# Altium PCB PCB1.PcbDoc
Units mm, origin at the board's own origin, x right, y up, seen from the top; angles counter-clockwise.
Board outline 76 x 105 mm, 2 copper layers (Top Layer, Bottom Layer); 39 components, 59 nets, 148 pads, 16 vias.
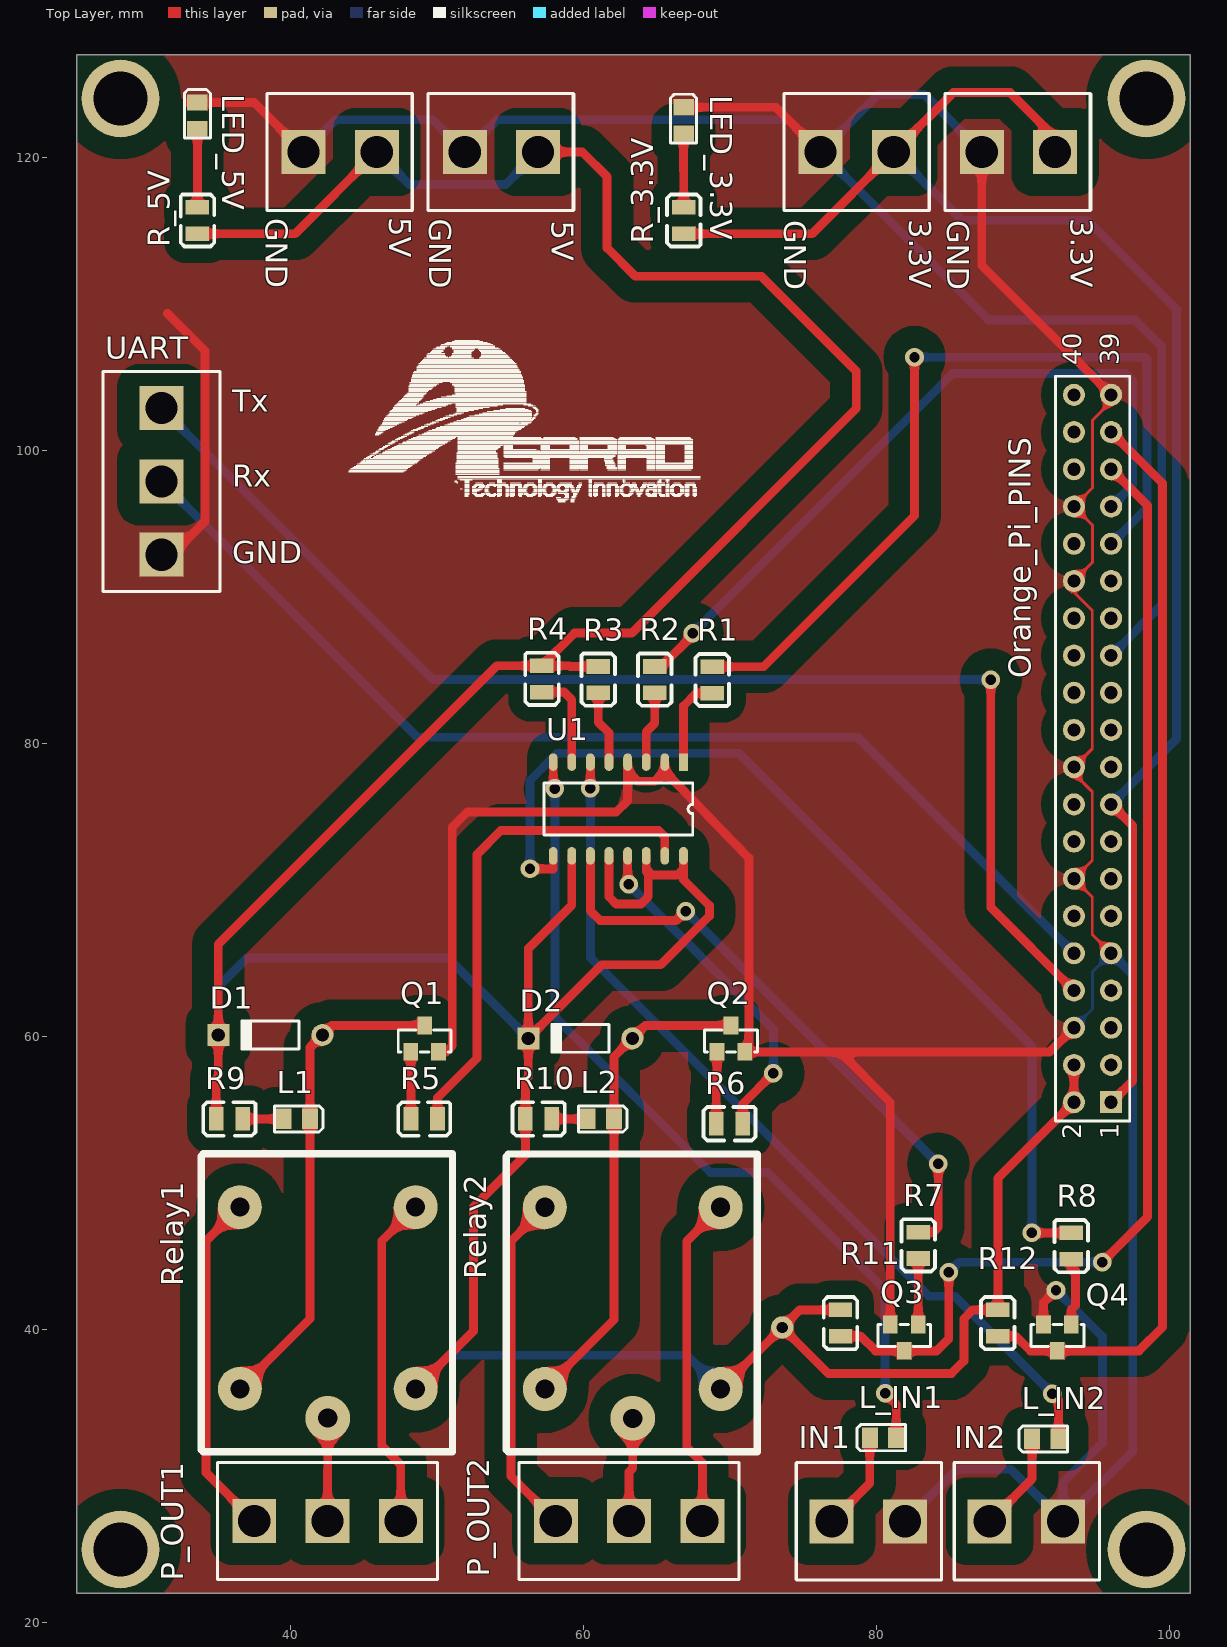
[diagram p0: Top Layer view]
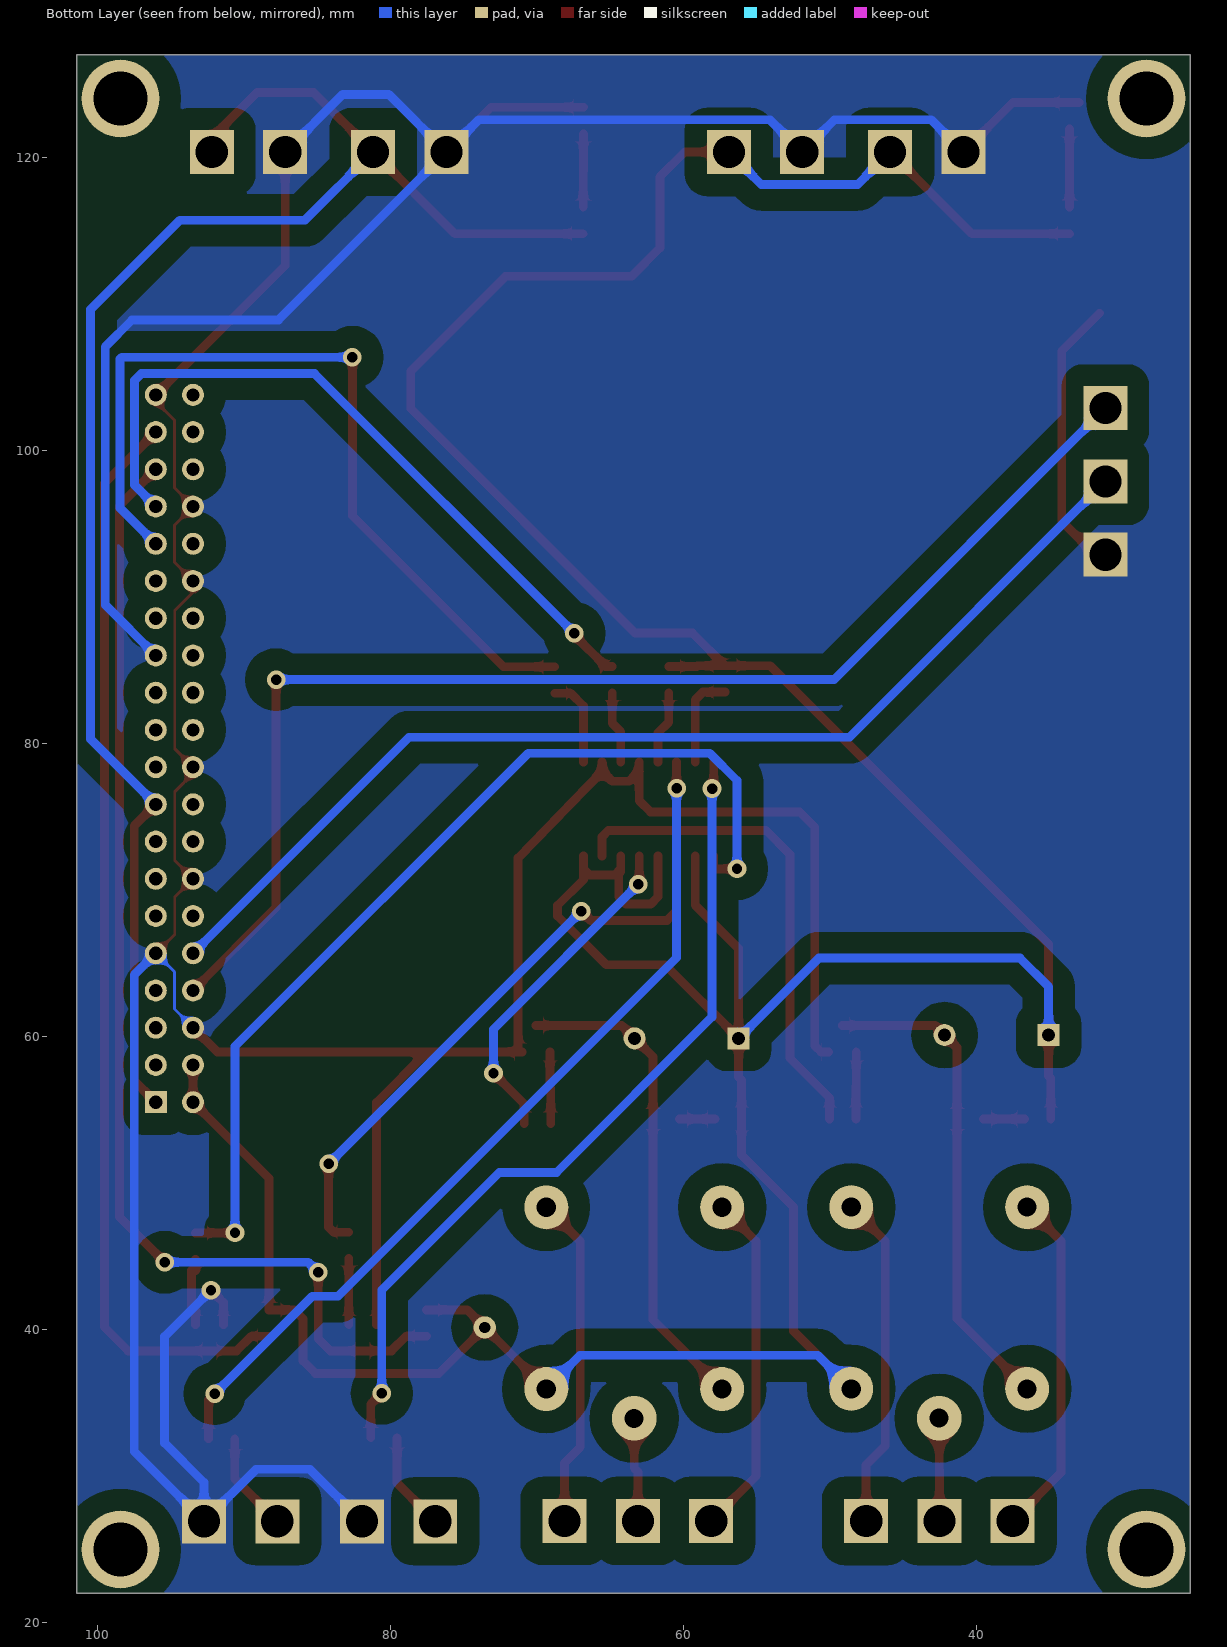
[diagram p1: Bottom Layer view, seen from below]

## Layer stack, top to bottom
Top Solder: solder mask 0.0102, Solder Resist, Dk 3.5
Top Layer: signal copper 0.0356
Dielectric 1: dielectric 0.32, FR-4, Dk 4.8
Bottom Layer: signal copper 0.0356
Bottom Solder: solder mask 0.0102, Solder Resist, Dk 3.5

## Board outline
25.4,127 101.4,127 101.4,22 25.4,22

## Design rules (kind name [scope] priority, off if disabled: settings)
Clearance Polygon [InPolygon] p1: gap=1.5 ignorepadtopadclearanceinfootprint=FALSE
Clearance [All] p2: gap=0.4 ignorepadtopadclearanceinfootprint=FALSE
HoleSize [All] p1: absolutevalues=TRUE maxlimit=4 minlimit=0.025 maxpercent=80.000 minpercent=20.000
PlaneClearance [All] p1: clearance=0.6
PlaneConnect [All] p1: planeconnectstyle=Direct reliefexpansion=0.508 reliefentries=4 reliefconductorwidth=0.254 reliefairgap=0.254
PolygonConnect [All] p1: connectstyle=Direct reliefconductorwidth=0.254 reliefentries=4 polygonreliefangle="90 Angle" airgapwidth=0.254
RoutingVias [All] p1: holewidth=3.7 width=4 viastyle="Through Hole" minholewidth=0.6 minwidth=1.27 maxholewidth=4 maxwidth=5
SilkToSilkClearance [All] p1: silktosilkclearance=0.2
SilkToSolderMaskClearance [IsPad] p1: minsilkscreentomaskgap=0 clearancetoexposedcopper=TRUE
SolderMaskExpansion [All] p1: expansion=0.102
Width [All] p1: maxlimit=0.6 minlimit=0.2 preferedwidth=0.6
25 further rules are at their usual default settings.

## Classes and differential pairs
component class Sheet1: 3.3V 5V D1 D2 IN1 IN2 L1 L2 L_IN1 L_IN2 LED_3.3V LED_5V Orange_Pi_PINS P_OUT1 P_OUT2 Q1 Q2 Q3 Q4 R1 R2 R3 R4 R5 R6 R7 R8 R9 R10 R11 R12 R_3.3V R_5V Relay1 Relay2 U1 UART

## Components (designator, comment, footprint, x,y, rotation, side; value= is the part's Value field where it differs from the comment)
3.3V "F2" PCBComponent_1#1 104.534,84.665 r90 top (schematic designator f4)
3.3V "F2" PCBComponent_1#1 115.534,84.665 r90 top (schematic designator f3)
5V "F2" PCBComponent_1#1 69.259,84.665 r90 top (schematic designator f6)
5V "F2" PCBComponent_1#1 80.259,84.665 r90 top (schematic designator f5)
D1 "Diode 1N914" DO-35 38.625,60.1 r180 top
D2 "Diode 1N914" DO-35 59.775,59.875 r180 top
IN1 "F2" PCBComponent_1#1 53.557,62.612 r270 top (schematic designator f1)
IN2 "F2" PCBComponent_1#1 64.332,62.612 r270 top (schematic designator f2)
L1 "LED_0805" LED_0805 40.436,54.375 r0 top
L2 "LED_0805" LED_0805 61.181,54.375 r0 top
L_IN1 "LED_0805" LED_0805 80.414,32.625 r180 top
L_IN2 "LED_0805" LED_0805 91.489,32.55 r180 top
LED_3.3V "LED_0805" LED_0805 66.816,122.51 r90 top
LED_5V "LED_0805" LED_0805 33.65,122.836 r90 top
Orange_Pi_PINS "Header 20X2" HDR2X20 95.99,55.52 r90 top
P_OUT1 "Terminal3" TERMINAL-3 42.526,26.943 r0 top
P_OUT2 "Terminal3" TERMINAL-3 63.1,26.95 r0 top
Q1 "BC817" "PCBComponent_1 - duplicate2" 49.15,58.95 r0 top
Q2 "BC817" "PCBComponent_1 - duplicate2" 70.05,58.95 r0 top
Q3 "BC817" "PCBComponent_1 - duplicate2" 81.875,40.35 r180 top
Q4 "BC817" "PCBComponent_1 - duplicate2" 92.325,40.35 r180 top
R1 "Res_0805" ResS 68.775,84.325 r90 top value=1K
R2 "Res_0805" ResS 64.85,84.35 r270 top value=1K
R3 "Res_0805" ResS 61,84.35 r270 top value=1K
R4 "Res_0805" ResS 57.15,84.4 r270 top value=1K
R5 "Res_0805" ResS 49.125,54.375 r180 top value=560
R6 "Res_0805" ResS 69.95,54.05 r180 top value=560
R7 "Res_0805" ResS 82.825,45.75 r270 top value=560
R8 "Res_0805" ResS 93.275,45.7 r270 top value=560
R9 "Res_0805" ResS 35.831,54.375 r180 top value=160
R10 "Res_0805" ResS 56.925,54.375 r180 top value=160
R11 "Res_0805" ResS 77.525,40.45 r90 top value=160
R12 "Res_0805" ResS 88.25,40.45 r90 top value=160
R_3.3V "Res_0805" ResS 66.825,115.675 r90 top value=1k
R_5V "Res_0805" ResS 33.65,115.675 r270 top value=1k
Relay1 "JOC-3FF" PCBComponent_1#2 42.542,33.96 r0 top
Relay2 "JOC-3FF" PCBComponent_1#2 63.35,33.95 r0 top
U1 "TLP-281-4" TLP281-4 66.81,78.725 r270 top
UART "Terminal3" TERMINAL-3 31.2,97.875 r90 top (schematic designator P)

## Footprints (in the part's own frame and the unit in brackets; to place one, negate y for a bottom-side part, rotate by r counter-clockwise, add the part's x,y. Pads: shape width x height; smd on the part's side, far side on the other; paste and mask are expansions set on the pad)
DO-35 [mm] "Diode, Axial; Body 3.8 x 1.9 mm (LxDia. max), Lead Dia. 0.53 mm (max)"
  round 1.5 hole 0.9: 1(-3.55,0)
  rect 1.5x1.5 hole 0.9: 2(3.55,0)
  silkscreen extent -1.95,-0.95 2.05,0.95
HDR2X20 [mm] "Connector; Header; 20x2 Position"
  rect 1.5x1.5 hole 0.9: 1(0,0)
  round 1.5 hole 0.9: 2(0,2.54) 3(2.54,0) 4(2.54,2.54) 5(5.08,0) 6(5.08,2.54) 7(7.62,0) 8(7.62,2.54) 9(10.16,0) 10(10.16,2.54) 11(12.7,0) 12(12.7,2.54) 13(15.24,0) 14(15.24,2.54) 15(17.78,0) 16(17.78,2.54) 17(20.32,0) 18(20.32,2.54) 19(22.86,0) 20(22.86,2.54) 21(25.4,0) 22(25.4,2.54) 23(27.94,0) 24(27.94,2.54) 25(30.48,0) 26(30.48,2.54) 27(33.02,0) 28(33.02,2.54) 29(35.56,0) 30(35.56,2.54) 31(38.1,0) 32(38.1,2.54) 33(40.64,0) 34(40.64,2.54) 35(43.18,0) 36(43.18,2.54) 37(45.72,0) 38(45.72,2.54) 39(48.26,0) 40(48.26,2.54)
  silkscreen extent -1.27,-1.27 49.53,3.81
LED_0805 [mm]
  rect 1.1x1.4 smd: 1(-0.911,0) 2(0.889,0)
  silkscreen extent -1.53,-0.89 1.78,0.89
PCBComponent_1#1 [mm]
  rect 3x3 hole 2.2: 1(35.687,23.368) 2(35.687,28.368)
  silkscreen extent 31.69,20.95 39.69,30.87
PCBComponent_1#2 [mm]
  round 3 hole 1.3: 1(-6,2) 2(6,2) 3(-6,14.4) 4(6,14.4)
  round 3.048 hole 1.3: 5(0,0)
  silkscreen extent -8.64,-2.29 8.51,18.03
"PCBComponent_1 - duplicate2" [mm]
  rect 1x1.2 smd: B(-0.95,0) C(0,1.8) E(0.95,0)
  silkscreen extent -1.8,0 1.8,1.5
ResS [mm]
  rect 1x1.6 smd: 1(-0.9,0) 2(0.9,0)
  silkscreen extent -1.78,-1.14 1.78,1.14
TERMINAL-3 [mm]
  rect 3x3 hole 2.2: 1(-5,0) 2(0,0) 3(5,0)
  silkscreen extent -7.5,-4 7.5,4
TLP281-4 [mm]
  rect 1.2x0.6 smd: 1(0,0)
  oval 1.2x0.6 smd: 2(0,-1.27) 3(0,-2.54) 4(0,-3.81) 5(0,-5.08) 6(0,-6.35) 7(0,-7.62) 8(0,-8.89) 9(6.4,-8.89) 10(6.4,-7.62) 11(6.4,-6.35) 12(6.4,-5.08) 13(6.4,-3.81) 14(6.4,-2.54) 15(6.4,-1.27) 16(6.4,0)
  silkscreen extent 1.43,-9.52 4.97,0.64

## Part data
3.3V 3.3V 5V 5V IN1 IN2: library part Component_1
D1 D2: "High Conductance Fast Diode", Code_JEDEC=DO-204-AH, ComponentLink1Description="Manufacturer Link", ComponentLink1URL=http://www.fairchildsemi.com/, ComponentLink2Description=Datasheet, ComponentLink2URL=http://www.fairchildsemi.com/ds/1N%2F1N4448.pdf, DatasheetVersion=1997, LatestRevisionDate=17-Jul-2002, LatestRevisionNote="Re-released for DXP Platform.", PackageDescription="Diode, Axial; Body 3.8 x 1.9 mm (LxDia. max), Lead Dia. 0.53 mm (max)", PackageReference=DO-35, Published=8-Jun-2000, Publisher="Altium Limited"
Orange_Pi_PINS: "Header, 20-Pin, Dual row", LatestRevisionDate=17-Jul-2002, LatestRevisionNote="Re-released for DXP Platform.", Publisher="Altium Limited"
P_OUT1 P_OUT2 UART: library part Terminal-3
Q1 Q2 Q3 Q4: library part Transistor_SMD_NPN
Relay1 Relay2: library part Relay-5VDC, "Relay"
U1: library part OPTO-TLP281-4

## Free pads (board coordinates)
  round 5.3 hole 3.7: 2(28.4,124) 3(98.4,124) 4(98.4,25) 5(28.4,25)
  round 1.524 hole 0.762: 6(73.55,40.15)

## Via types
v1: diameter 1.27, hole 0.711, Top Layer to Bottom Layer, 16 vias

## Nets (pads, with @x,y where several pads share a name; then routed paths per layer and width w, separated by ;. In a path a pad name is that pad's centre, name@x,y a point inside that pad or via, vN(x,y) a via of type N, cw(c..) or ccw(c..) an arc to the next point about the centre after c; other vN are vias at no path point)
GND: 3.3V.2 5V.2 IN1.2 IN2.2 LED_3.3V.2 LED_5V.2 Orange_Pi_PINS.6 Orange_Pi_PINS.9 Orange_Pi_PINS.14 Orange_Pi_PINS.20 Orange_Pi_PINS.25 Orange_Pi_PINS.30 Orange_Pi_PINS.34 Orange_Pi_PINS.39 Q1.E Q2.E Q3.E Q4.E U1.2 U1.4 UART.1 | length 388.9
  Top Layer w0.2: Orange_Pi_PINS.9 94.7,66.97 94.7,69.51 Orange_Pi_PINS.14 94.7,72.01 94.7,76.7 93.45,77.95 Orange_Pi_PINS.20 94.7,79.63 94.7,89.058 93.45,90.308 Orange_Pi_PINS.30 94.725,92.355 94.725,94.885 Orange_Pi_PINS.34 94.725,97.435 94.725,102.05 95.99,103.315 Orange_Pi_PINS.39
  Top Layer w0.6: UART.1 31.9,92.875 34.175,95.15 34.175,106.77 31.6,109.345 ; LED_5V.2@33,123.725 LED_5V.2 37.518,123.725 5V.2@40.891,120.352 ; Q1.E 50.606,58.95 51.029,59.372 51.029,74.295 52.054,75.32 62.23,75.32 63,76.09 63,78.105 ; U1.4 63,78.105 ; U1.2 65.54,78.105 ; LED_3.3V.2 73.119,123.399 3.3V.2@76.166,120.352 ; Q2.E Q2.E@71.272,58.95 ; Q3.E 80.925,55.495 77.47,58.95 ; 3.3V.2@87.166,120.352 87.166,112.604 Orange_Pi_PINS.39 ; Q4.E 91.375,41.845 v1(92.227,42.697) ; Orange_Pi_PINS.6 91.8,58.95 77.47,58.95 ; 63,78.105 63.686,77.419 64.854,77.419 65.54,78.105 ; 65.54,78.105 71.272,72.187 Q2.E@71.272,58.95 ; Q2.E@71.272,58.95 77.47,58.95
  Bottom Layer w0.2: Orange_Pi_PINS.6 94.725,61.875 94.725,64.415 Orange_Pi_PINS.9
  Bottom Layer w0.6: 5V.2@40.891,120.352 43.094,122.555 49.688,122.555 51.891,120.352 54.094,122.555 73.963,122.555 3.3V.2@76.166,120.352 ; IN1.2 85.48,30.48 89.145,30.48 IN2.2 ; 3.3V.2@87.166,120.352 83.236,124.282 80.096,124.282 3.3V.2@76.166,120.352 ; v1(92.227,42.697) 95.4,39.525 95.4,32.275 92.7,29.575 IN2.2 ; Orange_Pi_PINS.9 97.46,64.21 97.46,31.685 IN2.2 ; Orange_Pi_PINS.25 99.44,89.45 99.44,107.062 97.612,108.89 87.628,108.89 3.3V.2@76.166,120.352
INP1: IN1.1 L_IN1.2 | length 6.8
  Top Layer w0.6: IN1.1 79.525,29.525 L_IN1.2
INP2: IN2.1 L_IN2.2 | length 6.8
  Top Layer w0.6: IN2.1 90.6,29.825 L_IN2.2
NetL1_1: L1.1 R9.1 | length 2.8
  Top Layer w0.6: R9.1 L1.1
NetL2_1: L2.1 R10.1 | length 2.4
  Top Layer w0.6: R10.1 L2.1
NetL_IN1_1: L_IN1.1 U1.8 | length 58.1
  Top Layer w0.6: U1.8 57.92,77.038 v1(58.039,76.919) ; v1(80.569,35.662) 81.325,34.905 L_IN1.1
  Bottom Layer w0.6: v1(58.039,76.919) 58.039,61.341 68.656,50.724 72.551,50.724 80.569,42.706 v1(80.569,35.662)
NetL_IN2_1: L_IN2.1 U1.6 | length 60.4
  Top Layer w0.6: v1(60.46,76.937) U1.6 ; v1(91.973,35.636) 92.4,35.21 L_IN2.1
  Bottom Layer w0.6: v1(60.46,76.937) 60.46,65.39 83.564,42.286 85.324,42.286 v1(91.973,35.636)
NetLED_3.3V_1: LED_3.3V.1 R_3.3V.2 | length 5
  Top Layer w0.6: LED_3.3V.1 66.816,119.084 66.825,119.075 R_3.3V.2
NetLED_5V_1: LED_5V.1 R_5V.1 | length 5.4
  Top Layer w0.6: R_5V.1 LED_5V.1
NetP_OUT1_1: P_OUT1.1 Relay1.3 | length 23.7
  Top Layer w0.6: Relay1.3 34.239,46.057 34.239,30.23 P_OUT1.1
NetP_OUT1_2: P_OUT1.2 Relay1.5 | length 7
  Top Layer w0.6: P_OUT1.2 42.526,30.429 42.542,30.445 Relay1.5
NetP_OUT1_3: P_OUT1.3 Relay1.4 | length 22.9
  Top Layer w0.6: P_OUT1.3 47.526,30.785 46.228,32.083 46.228,46.046 Relay1.4
NetP_OUT2_1: P_OUT2.1 Relay2.3 | length 23.6
  Top Layer w0.6: Relay2.3 55.042,46.042 55.042,30.008 P_OUT2.1
NetP_OUT2_2: P_OUT2.2 Relay2.5 | length 7.1
  Top Layer w0.6: P_OUT2.2 63.1,30.302 63.35,30.552 Relay2.5
NetP_OUT2_3: P_OUT2.3 Relay2.4 | length 22.8
  Top Layer w0.6: P_OUT2.3 68.1,30.912 67.031,31.981 67.031,46.031 Relay2.4
NetQ1_B: Q1.B R5.2 | length 4.6
  Top Layer w0.6: Q1.B 48.2,56.667 48.225,56.642 R5.2
NetQ2_B: Q2.B R6.2 | length 4.9
  Top Layer w0.6: R6.2 69.05,56.464 69.1,56.514 Q2.B
NetQ3_B: Q3.B R7.2 | length 4.5
  Top Layer w0.6: Q3.B R7.2
NetQ4_B: Q4.B R8.2 | length 4.9
  Top Layer w0.6: Q4.B 93.275,41.362 93.562,41.65 93.562,44.026 93.275,44.026 R8.2
NetR1_1: R1.1 U1.1 | length 6.2
  Top Layer w0.6: U1.1 66.81,82.55 67.685,83.425 R1.1
NetR2_2: R2.2 U1.3 | length 5
  Top Layer w0.6: U1.3 64.27,80.797 64.85,81.377 R2.2
NetR3_2: R3.2 U1.5 | length 5
  Top Layer w0.6: R3.2 61,81.451 61.73,80.721 U1.5
NetR4_2: R4.2 U1.7 | length 6.5
  Top Layer w0.6: R4.2 58.674,83.5 59.19,82.984 U1.7
NetR5_1: R5.1 U1.15 | length 34.2
  Top Layer w0.6: R5.1 50.025,55.829 52.73,58.535 52.73,72.441 54.347,74.058 65.117,74.058 65.54,73.635 U1.15
NetR6_1: R6.1 U1.13 | length 23.3
  Top Layer w0.6: U1.13 63,70.452 v1(63.068,70.383) ; R6.1 70.85,55.397 v1(72.949,57.496)
  Bottom Layer w0.6: v1(63.068,70.383) 72.949,60.503 v1(72.949,57.496)
NetR7_1: R7.1 U1.11 | length 41
  Top Layer w0.6: U1.11 60.46,68.58 61.12,67.92 66.319,67.92 v1(66.954,68.555) ; R7.1 83.861,46.65 84.201,46.99 v1(84.201,51.308)
  Bottom Layer w0.6: v1(66.954,68.555) v1(84.201,51.308)
NetR8_1: R8.1 U1.9 | length 67.2
  Top Layer w0.6: v1(56.337,71.438) 57.92,71.438 U1.9 ; v1(90.585,46.6) R8.1
  Bottom Layer w0.6: v1(56.337,71.438) 56.337,77.47 58.191,79.324 70.587,79.324 90.585,59.325 v1(90.585,46.6)
PA0: Orange_Pi_PINS.13
PA1: Orange_Pi_PINS.11
PA2: Orange_Pi_PINS.22
PA3: Orange_Pi_PINS.15
PA6: Orange_Pi_PINS.7
PA7: Orange_Pi_PINS.29
PA8: Orange_Pi_PINS.31 R1.2 | length 58.4
  Top Layer w0.6: R1.2 72.271,85.225 82.575,95.529 v1(82.575,106.35)
  Bottom Layer w0.6: v1(82.575,106.35) 98.32,106.35 98.44,106.23 98.44,96.07 Orange_Pi_PINS.31
PA9: Orange_Pi_PINS.33 R2.1 | length 50.3
  Top Layer w0.6: R2.1 65.303,85.25 67.437,87.384 v1(67.437,87.503)
  Bottom Layer w0.6: v1(67.437,87.503) 85.164,105.23 96.985,105.23 97.44,104.775 97.44,97.61 Orange_Pi_PINS.33
PA10: Orange_Pi_PINS.35 Q3.C R11.1 | length 79.8
  Top Layer w0.6: R11.1 78.918,39.55 79.918,38.55 Q3.C 84.092,38.55 84.912,39.37 v1(84.912,43.917) ; v1(95.377,44.602) 98.476,47.701 98.476,96.214 Orange_Pi_PINS.35
  Bottom Layer w0.6: v1(84.912,43.917) 85.598,44.602 v1(95.377,44.602)
PA11: Orange_Pi_PINS.5
PA12: Orange_Pi_PINS.3
PA13: Orange_Pi_PINS.8 UART.3 | length 87.8
  Top Layer w0.6: v1(87.782,84.353) 87.782,68.808 Orange_Pi_PINS.8
  Bottom Layer w0.6: UART.3 49.722,84.353 v1(87.782,84.353)
PA14: Orange_Pi_PINS.10 UART.2 | length 75.6
  Bottom Layer w0.6: UART.2 48.659,80.416 78.714,80.416 Orange_Pi_PINS.10
PA18: Orange_Pi_PINS.28
PA19: Orange_Pi_PINS.27
PA20: Orange_Pi_PINS.37 Q4.C R12.1 | length 74.9
  Top Layer w0.6: R12.1 89.484,39.55 90.484,38.55 Q4.C 97.884,38.55 99.492,40.157 99.492,97.738 Orange_Pi_PINS.37
PA21: Orange_Pi_PINS.26
PC0: Orange_Pi_PINS.19
PC1: Orange_Pi_PINS.21
PC2: Orange_Pi_PINS.23
PC3: Orange_Pi_PINS.24
PC4: Orange_Pi_PINS.16
PC7: Orange_Pi_PINS.18
PD14: Orange_Pi_PINS.12
PG6: Orange_Pi_PINS.38
PG7: Orange_Pi_PINS.40
PG8: Orange_Pi_PINS.32
PG9: Orange_Pi_PINS.36
RELAY-OUT1: D1.1 L1.2 Q1.C Relay1.1 | length 33.7
  Top Layer w0.6: Relay1.1 41.325,40.743 L1.2 41.325,59.25 D1.1 42.825,60.75 Q1.C
RELAY-OUT2: D2.1 L2.2 Q2.C Relay2.1 | length 33.5
  Top Layer w0.6: Relay2.1 62.07,40.67 L2.2 62.07,58.62 D2.1 64.2,60.75 Q2.C
VCC-3.3: 3.3V.1 Orange_Pi_PINS.1 Orange_Pi_PINS.17 R_3.3V.1 | length 112.5
  Top Layer w0.6: R_3.3V.1 75.589,114.775 81.166,120.352 85.214,124.4 89.1,124.4 92.166,121.334 3.3V.1@92.166,120.352 ; Orange_Pi_PINS.1 97.46,56.99 97.46,74.37 Orange_Pi_PINS.17
  Bottom Layer w0.6: 3.3V.1@81.166,120.352 85.821,115.697 94.361,115.697 100.44,109.618 100.44,80.29 Orange_Pi_PINS.17
VCC-5: 5V.1 D1.2 D2.2 Orange_Pi_PINS.2 Orange_Pi_PINS.4 pad.6 R3.1 R4.1 R9.2 R10.2 R11.2 R12.2 R_5V.2 Relay1.2 Relay2.2 U1.10 U1.12 U1.14 U1.16 | length 307.2
  Top Layer w0.6: R_5V.2 40.314,114.775 5V.1@45.891,120.352 ; R9.2 34.931,57.15 35.075,57.294 D1.2 35.075,66.298 54.077,85.3 R4.1 ; Relay1.2 52.476,39.894 52.476,48.362 56.025,51.91 R10.2 56.025,57.023 56.225,57.223 D2.2 ; 5V.1@56.891,120.352 59.898,120.352 61.6,118.65 61.6,113.8 63.525,111.875 72.125,111.875 78.6,105.4 78.6,102.85 63.275,87.525 59.375,87.525 R4.1 ; U1.10 59.19,68.965 56.225,66 D2.2 ; R3.1 59.08,85.25 59.03,85.3 R4.1 ; U1.12 61.73,69.532 62.226,69.036 63.907,69.036 64.403,69.532 64.403,71.12 64.27,71.253 64.27,71.438 ; U1.14 64.27,71.438 ; U1.16 66.81,71.438 ; Relay2.2 pad.6 ; R11.2 74.75,41.35 pad.6 ; Orange_Pi_PINS.4 Orange_Pi_PINS.2 88.265,50.335 88.265,41.35 R12.2 86.55,41.35 85.95,40.75 85.95,37.868 85.09,37.008 76.692,37.008 pad.6 ; D2.2 61.247,64.897 65.253,64.897 68.58,68.224 68.58,68.936 66.81,70.706 66.81,71.438 ; 64.27,71.438 64.689,71.018 66.391,71.018 66.81,71.438
  Bottom Layer w0.6: D1.2 35.075,63.4 37.025,65.35 50.75,65.35 D2.2 ; 5V.1@45.891,120.352 48.108,118.135 54.674,118.135 5V.1@56.891,120.352 ; Relay1.2 50.834,38.252 67.048,38.252 Relay2.2

## Polygon pours and split planes (outlines as drawn)
GND on Top Layer "GND_L01_P025" (solid, remove dead copper, pour order 25): 25.4,127 101.4,127 101.4,22 25.4,22
GND on Bottom Layer "GND_L02_P026" (solid, remove dead copper, pour order 26): 25.4,127 101.4,127 101.4,22 25.4,22

## Silkscreen, mask and mechanical layers (free items; w line width, h text height)
Top Overlay:
  drawing of 832 lines, arcs and shapes, not listed
  text "GND" at 38.325,115.825 h1.52 r270
  text "GND" at 49.45,115.8 h1.52 r270
  text "GND" at 73.675,115.7 h1.52 r270
  text "GND" at 84.8,115.7 h1.52 r270
  text "Tx" at 36.025,102.625 h1.52
  text "Rx" at 36.025,97.525 h1.52
  text "GND" at 36.025,92.3 h1.52
Bottom Paste:
  lines w0.254: 20.892,23.535 21.4,22.011 ; 20.892,125.487 21.4,127.011 ; 21.146,22.011 21.654,22.011 ; 21.146,127.011 21.654,127.011 ; 21.4,68.773 21.4,22.011 ; 21.4,80.25 21.4,127.011 ; 21.908,23.535 21.4,22.011 ; 21.908,125.487 21.4,127.011 ; 25.396,17.746 25.396,18.254 ; 25.396,130.746 25.396,131.254 ; 26.92,17.492 25.396,18 ; 26.92,18.508 25.396,18 ; 26.92,130.492 25.396,131 ; 26.92,131.508 25.396,131 ; 58.292,18 25.396,18 ; 58.292,131 25.396,131 ; 68.5,18 101.396,18 ; 68.5,131 101.396,131 ; 93.36,147.413 95.9,147.4 ; 93.986,135.933 96.526,135.933 ; 94.373,146.9 95.9,147.4 ; 94.379,147.916 95.9,147.4 ; 95.002,135.425 96.526,135.933 ; 95.002,136.441 96.526,135.933 ; 95.899,147.146 95.901,147.654 ; 96.526,135.679 96.526,136.187 ; 97.51,141.267 100.05,141.275 ; 98.525,141.778 100.05,141.275 ; 98.528,140.762 100.05,141.275 ; 99.872,17.492 101.396,18 ; 99.872,18.508 101.396,18 ; 99.872,130.492 101.396,131 ; 99.872,131.508 101.396,131 ; 100.049,141.529 100.051,141.021 ; 100.226,135.679 100.226,136.187 ; 100.899,147.121 100.901,147.629 ; 101.396,17.746 101.396,18.254 ; 101.396,130.746 101.396,131.254 ; 101.399,141.533 101.401,141.025 ; 101.75,135.425 100.226,135.933 ; 101.75,136.441 100.226,135.933 ; 102.421,146.859 100.9,147.375 ; 102.427,147.875 100.9,147.375 ; 102.766,135.933 100.226,135.933 ; 102.922,141.792 101.4,141.279 ; 102.925,140.776 101.4,141.279 ; 103.44,147.362 100.9,147.375 ; 103.94,141.287 101.4,141.279 ; 104.892,23.535 105.4,22.011 ; 104.892,125.487 105.4,127.011 ; 105.146,22.011 105.654,22.011 ; 105.146,127.011 105.654,127.011 ; 105.4,68.773 105.4,22.011 ; 105.4,80.25 105.4,127.011 ; 105.908,23.535 105.4,22.011 ; 105.908,125.487 105.4,127.011 ; 108.792,124.151 109.3,125.675 ; 108.792,128.549 109.3,127.025 ; 109.046,125.675 109.554,125.675 ; 109.046,127.025 109.554,127.025 ; 109.3,123.135 109.3,125.675 ; 109.3,129.565 109.3,127.025 ; 109.808,124.151 109.3,125.675 ; 109.808,128.549 109.3,127.025
  text "5 (mm)" at 94.294,143.751 h1.52 r359.71
  text "1.35 (mm)" at 94.616,137.602 h1.52 r0.17
  text "3.7 (mm)" at 92.891,132.276 h1.52
  text "76 (mm)" at 58.546,130.086 h1.52
  text "1.35 (mm)" at 112.957,120.231 h1.52 r90
  text "105 (mm)" at 22.314,69.027 h1.52 r90
  text "105 (mm)" at 106.314,69.027 h1.52 r90
  text "76 (mm)" at 58.546,17.086 h1.52
Mechanical 1:
  the board outline again, w0.254

## Text inside footprints (layer, text, board x,y; h text height)
Orange_Pi_PINS: Top Overlay "1" at 96.498,52.98 h1.27 r90; Top Overlay "2" at 93.958,52.98 h1.27 r90; Top Overlay "40" at 93.958,105.812 h1.27 r90; Top Overlay "39" at 96.498,105.812 h1.27 r90